# Altium PCB PCB_CDCEMU2000HW01.PcbDoc
Units mm, origin at the board's own origin, x right, y up, seen from the top; angles counter-clockwise.
Board outline 51 x 111 mm, 2 copper layers (Top Layer, Bottom Layer); 108 components, 88 nets, 362 pads, 22 vias.
Unrouted connection lines stored in the file: 3.
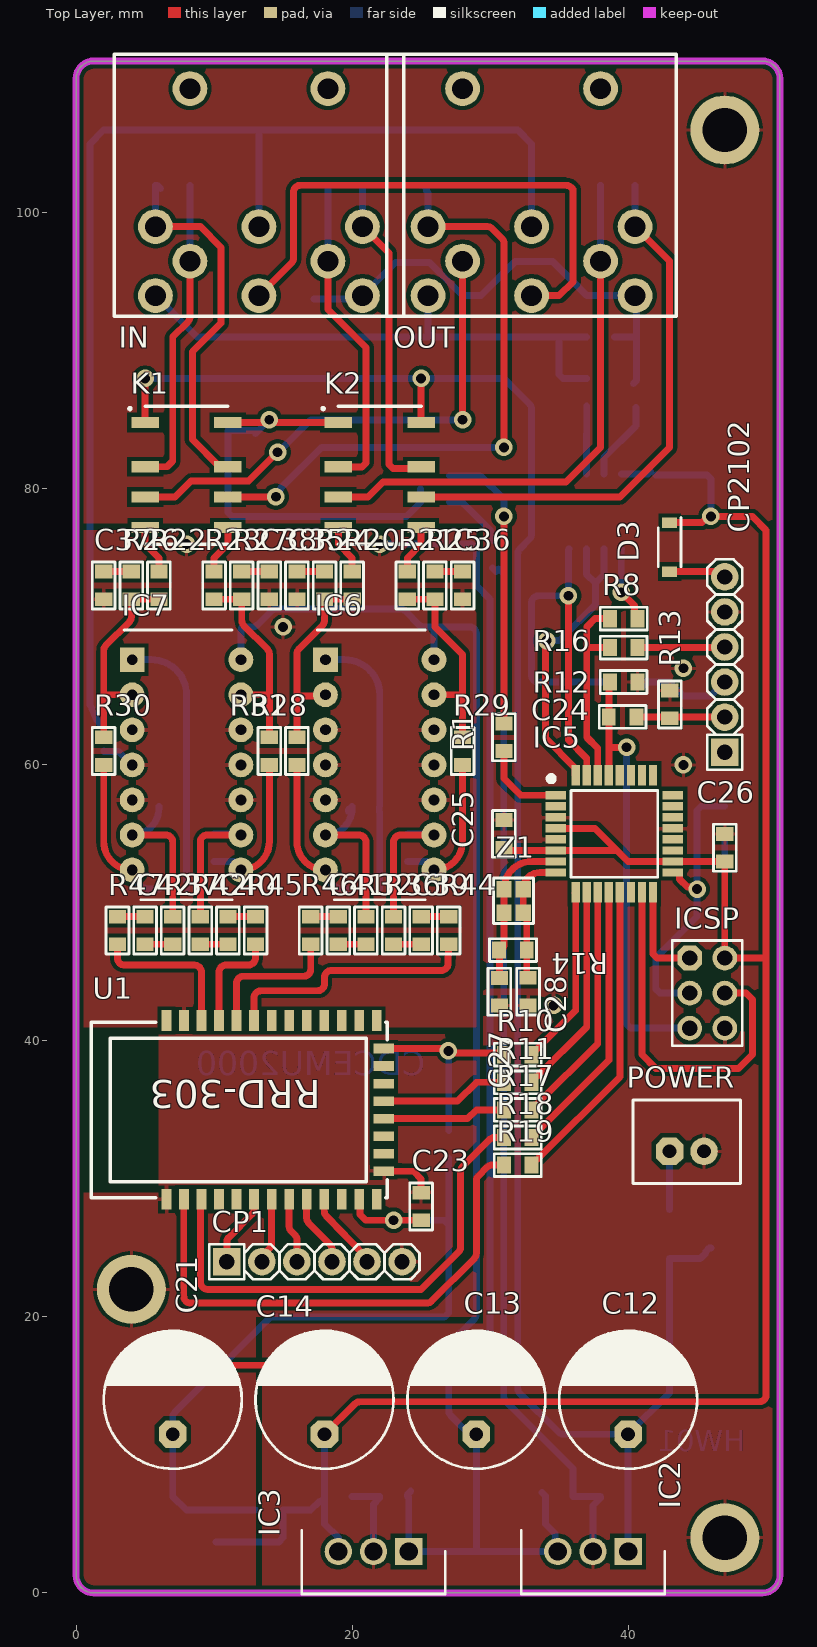
[diagram p0: Top Layer view]
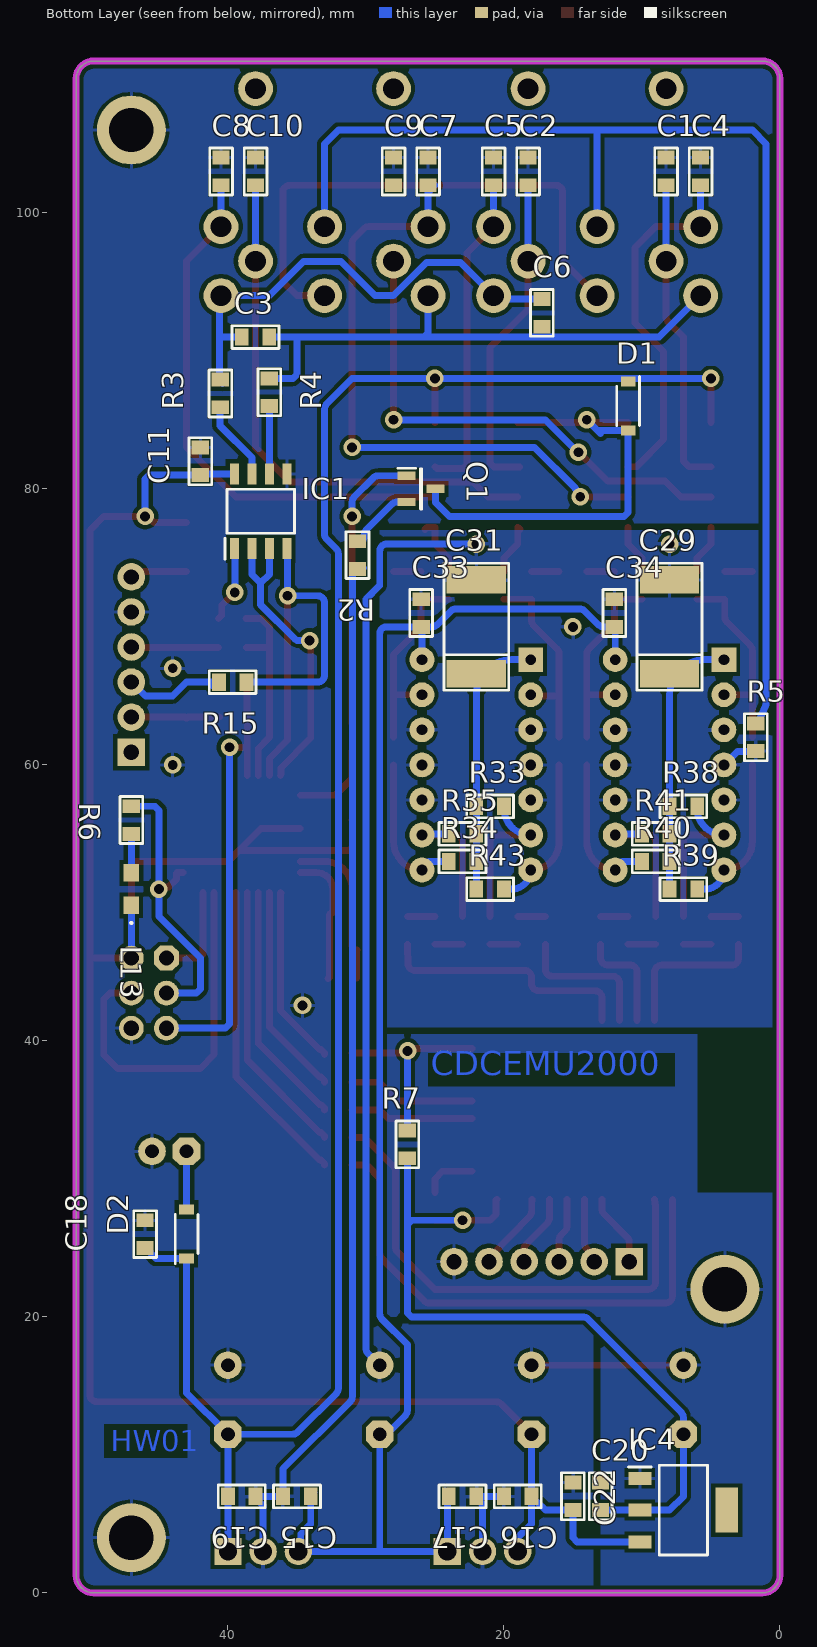
[diagram p1: Bottom Layer view, seen from below]
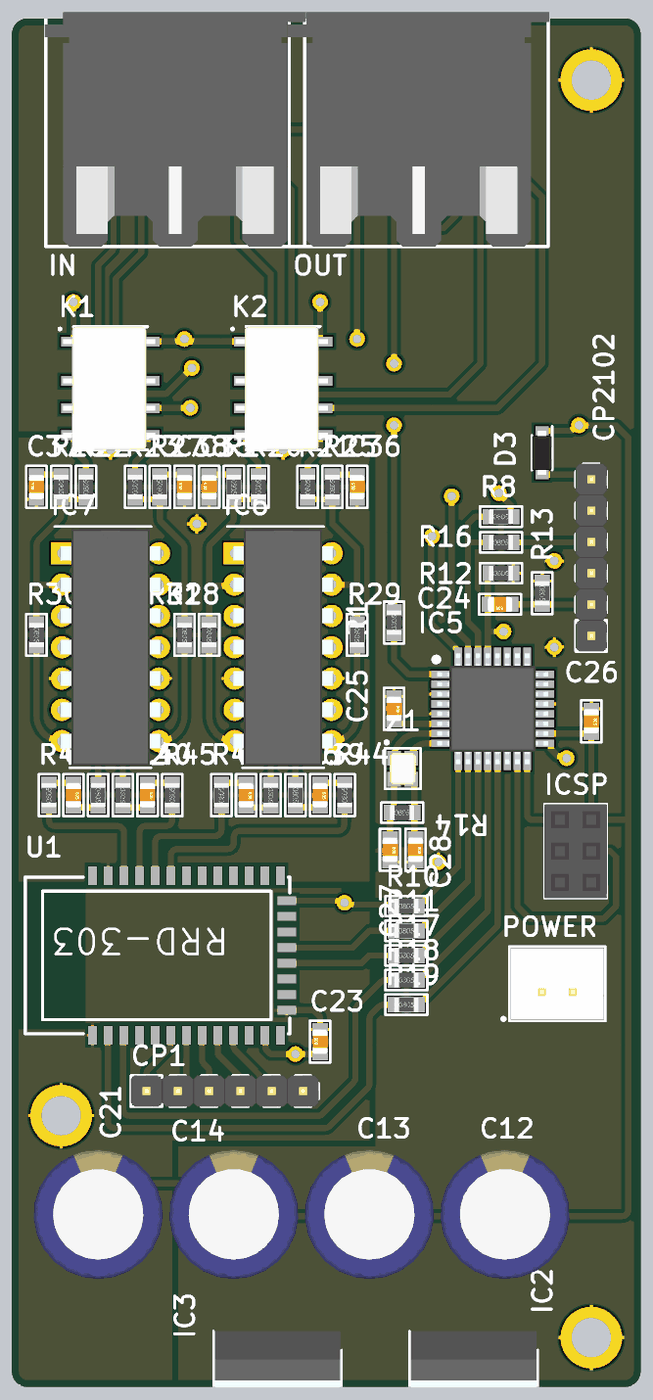
[diagram p2: 3D render of the assembled board from above, using the file's embedded part models]
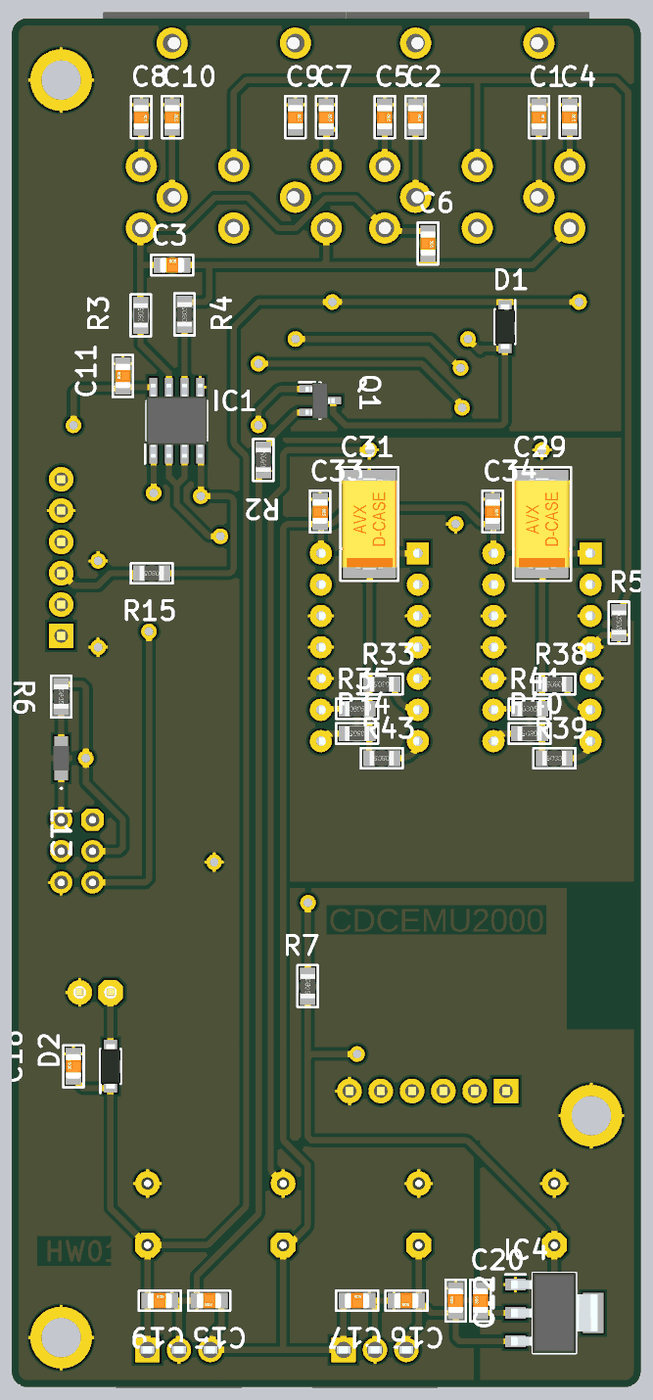
[diagram p3: 3D render of the assembled board from below, using the file's embedded part models]

## Layer stack, top to bottom
Top Solder: solder mask 0.0102, Solder Resist, Dk 3.5
Top Layer: signal copper 0.0356
Dielectric 1: dielectric 0.32, FR-4, Dk 4.8
Bottom Layer: signal copper 0.0356
Bottom Solder: solder mask 0.0102, Solder Resist, Dk 3.5

## Board outline
0,1.27 0,109.73 cw(c1.27,109.73) 1.27,111 49.73,111 cw(c49.73,109.73) 51,109.73 51,1.27 cw(c49.73,1.27) 49.73,0 1.27,0 cw(c1.27,1.27)

## Design rules (kind name [scope] priority, off if disabled: settings)
Clearance [All] p1: gap=0.2 ignorepadtopadclearanceinfootprint=FALSE except(0.3: Arc-Fill Arc-Poly Arc-Region Track-Fill Track-Poly Track-Region SMDPad-Fill SMDPad-Poly SMDPad-Region THPad-Fill THPad-Poly THPad-Region Via-Fill Via-Poly Via-Region Fill-Fill Fill-Poly Fill-Region Poly-Poly Poly-Region Region-Region)
ComponentClearance [All] p1: gap=0 collisioncheckmode=3 verticalgap=0 showdistances=FALSE
PolygonConnect [All] p1: connectstyle=Relief reliefconductorwidth=0.254 reliefentries=4 polygonreliefangle="90 Angle" airgapwidth=0.254
RoutingVias [All] p1: holewidth=0.711 width=1.27 viastyle="Through Hole" minholewidth=0.711 minwidth=1.27 maxholewidth=0.711 maxwidth=1.27
SolderMaskExpansion [All] p1: expansion=0.15 istentingtop=FALSE
Width [All] p1: maxlimit=1 minlimit=0.5 preferedwidth=0.75 minimp=50.000000 maximp=50.000000 favimp=50.000000
29 further rules are at their usual default settings.

## Classes and differential pairs
component class DIFFAMP: C29 C31 C33 C34 C35 C36 C37 C38 C39 C40 C41 C42 IC6 IC7 R5 R20 R21 R22 R23 R24 R25 R26 R27 R28 R29 R30 R31 R32 R33 R34 R35 R36 R37 R38 R39 R40 R41 R42 R43 R44 R45 R46 R47
component class "Relay and connector": C1 C2 C3 C4 C5 C6 C7 C8 C9 C10 C11 C12 C13 C14 C15 C16 C17 C18 C19 D1 D2 IC1 IC2 IC3 IN K1 K2 OUT POWER Q1 R1 R2 R3 R4 R8
component class MC: C20 C21 C22 C23 C24 C25 C26 C27 C28 CP1 CP2102 D3 IC4 IC5 ICSP L13 R6 R7 R10 R11 R12 R13 R14 R15 R16 R17 R18 R19 U1 Z1

## Components (designator, comment, footprint, x,y, rotation, side; value= is the part's Value field where it differs from the comment)
C1 "Ceramic capacitor, 10pF, X7R, ±10%, 16V, 0805, -55...+125°C" "CAP: 0805" 8.25,103 r270 bottom value=10pF
C2 "Ceramic capacitor, 10pF, X7R, ±10%, 16V, 0805, -55...+125°C" "CAP: 0805" 18.25,103 r270 bottom value=10pF
C3 "Ceramic capacitor, 1nF, X7R, ±10%, 16V, 0805, -55...+125°C" "CAP: 0805" 38,91 r180 bottom value=1nF
C4 "Ceramic capacitor, 10pF, X7R, ±10%, 16V, 0805, -55...+125°C" "CAP: 0805" 5.75,103 r270 bottom value=10pF
C5 "Ceramic capacitor, 10pF, X7R, ±10%, 16V, 0805, -55...+125°C" "CAP: 0805" 20.75,103 r270 bottom value=10pF
C6 "Ceramic capacitor, 1nF, X7R, ±10%, 16V, 0805, -55...+125°C" "CAP: 0805" 17.25,92.75 r270 bottom value=1nF
C7 "Ceramic capacitor, 10pF, X7R, ±10%, 16V, 0805, -55...+125°C" "CAP: 0805" 25.5,103 r270 bottom value=10pF
C8 "Ceramic capacitor, 10pF, X7R, ±10%, 16V, 0805, -55...+125°C" "CAP: 0805" 40.5,103 r270 bottom value=10pF
C9 "Ceramic capacitor, 10pF, X7R, ±10%, 16V, 0805, -55...+125°C" "CAP: 0805" 28,103 r270 bottom value=10pF
C10 "Ceramic capacitor, 10pF, X7R, ±10%, 16V, 0805, -55...+125°C" "CAP: 0805" 38,103 r270 bottom value=10pF
C11 "Ceramic capacitor, 0.1μF, X7R, ±10%, , 0805, -55...+125°C" "CAP: 0805" 42,82 r90 bottom value=0.1μF
C12 "Aluminium capacitor, 220μF, 25V, ±20%, 54mOhm, 14x10x5 mm, -55...+105°C" "CAP: D10C5H20" 40,14 r90 top value=220μF
C13 "Aluminium capacitor, 220μF, 25V, ±20%, 54mOhm, 14x10x5 mm, -55...+105°C" "CAP: D10C5H20" 29,14 r90 top value=220μF
C14 "Aluminium capacitor, 220μF, 25V, ±20%, 54mOhm, 14x10x5 mm, -55...+105°C" "CAP: D10C5H20" 18,14 r90 top value=220μF
C15 "Ceramic capacitor, 0.1μF, X7R, ±10%, , 0805, -55...+125°C" "CAP: 0805" 35,7 r0 bottom value=0.1μF
C16 "Ceramic capacitor, 0.1μF, X7R, ±10%, , 0805, -55...+125°C" "CAP: 0805" 19,7 r0 bottom value=0.1μF
C17 "Ceramic capacitor, 0.1μF, X7R, ±10%, , 0805, -55...+125°C" "CAP: 0805" 23,7 r180 bottom value=0.1μF
C18 "Ceramic capacitor, 0.1μF, X7R, ±10%, , 0805, -55...+125°C" "CAP: 0805" 46,26 r90 bottom value=0.1μF
C19 "Ceramic capacitor, 0.1μF, X7R, ±10%, , 0805, -55...+125°C" "CAP: 0805" 39,7 r180 bottom value=0.1μF
C20 "Ceramic capacitor, 0.1μF, X7R, ±10%, , 0805, -55...+125°C" "CAP: 0805" 13,7 r90 bottom value=0.1μF
C21 "Aluminium capacitor, 220μF, 25V, ±20%, 54mOhm, 14x10x5 mm, -55...+105°C" "CAP: D10C5H20" 7,14 r90 top value=220μF
C22 "Ceramic capacitor, 0.1μF, X7R, ±10%, , 0805, -55...+125°C" "CAP: 0805" 15,7 r90 bottom value=0.1μF
C23 "Ceramic capacitor, 0.1μF, X7R, ±10%, , 0805, -55...+125°C" "CAP: 0805" 25,28 r90 top value=0.1μF
C24 "Ceramic capacitor, 0.1μF, X7R, ±10%, , 0805, -55...+125°C" "CAP: 0805" 39.6,63.475 r180 top value=0.1μF
C25 "Ceramic capacitor, 0.1μF, X7R, ±10%, , 0805, -55...+125°C" "CAP: 0805" 31,55 r270 top value=0.1μF
C26 "Ceramic capacitor, 0.1μF, X7R, ±10%, , 0805, -55...+125°C" "CAP: 0805" 47,54 r270 top value=0.1μF
C27 "Ceramic capacitor, 9pF, X7R, ±10%, , 0805, -55...+125°C" "CAP: 0805" 30.672,43.564 r270 top value=9pF
C28 "Ceramic capacitor, 9pF, X7R, ±10%, , 0805, -55...+125°C" "CAP: 0805" 32.745,43.568 r270 top value=9pF
C29 "Tantalum capacitor, 100μF, 16V, ±20%, 900mOhm, case D (7343), -55...+125°C" "CAP: TANTAL-D" 8,70 r90 bottom value=100μF
C31 "Tantalum capacitor, 100μF, 16V, ±20%, 900mOhm, case D (7343), -55...+125°C" "CAP: TANTAL-D" 22,70 r90 bottom value=100μF
C33 "Ceramic capacitor, 0.1μF, X7R, ±10%, 16V, 0805, -55...+125°C" "CAP: 0805" 26,71 r270 bottom value=0.1μF
C34 "Ceramic capacitor, 0.1μF, X7R, ±10%, 16V, 0805, -55...+125°C" "CAP: 0805" 12,71 r270 bottom value=0.1μF
C35 "Ceramic capacitor, 0.1μF, X7R, ±10%, 16V, 0805, -55...+125°C" "CAP: 0805" 16,73 r90 top value=0.1μF
C36 "Ceramic capacitor, 0.1μF, X7R, ±10%, 16V, 0805, -55...+125°C" "CAP: 0805" 28,73 r90 top value=0.1μF
C37 "Ceramic capacitor, 0.1μF, X7R, ±10%, 16V, 0805, -55...+125°C" "CAP: 0805" 2,73 r90 top value=0.1μF
C38 "Ceramic capacitor, 0.1μF, X7R, ±10%, 16V, 0805, -55...+125°C" "CAP: 0805" 14,73 r90 top value=0.1μF
C39 "Ceramic capacitor, 1μF, X7R, ±10%, 16V, 0805, -55...+125°C" "CAP: 0805" 25,48 r270 top value=1μF
C40 "Ceramic capacitor, 1μF, X7R, ±10%, 16V, 0805, -55...+125°C" "CAP: 0805" 11,48 r270 top value=1μF
C41 "Ceramic capacitor, 1μF, X7R, ±10%, 16V, 0805, -55...+125°C" "CAP: 0805" 19,48 r270 top value=1μF
C42 "Ceramic capacitor, 1μF, X7R, ±10%, 16V, 0805, -55...+125°C" "CAP: 0805" 5,48 r270 top value=1μF
CP1 "Connector, 6pin, 2.54mm, 500VAC, 3A" "CON: PLS-6" 17.27,24 r0 top
CP2102 "Connector, 6pin, 2.54mm, 500VAC, 3A" "CON: PLS-6" 47,67.27 r90 top
D1 "SM4001PLHE3-TP" SODFL3616X135N 11,86 r270 bottom
D2 "SM4001PLHE3-TP" SODFL3616X135N 43,26 r90 bottom
D3 "SM4001PLHE3-TP" SODFL3616X135N 43,75.775 r270 top
IC1 "MAX485ECSA+" SOIC127P600X175-8N 37.623,78.375 r90 bottom
IC2 "L7809CV" TO255P460X1020X2008-3P 40,3 r180 top
IC3 "L7805CV" TO255P460X1020X2008-3P 24.1,3 r180 top
IC4 "LD1117AS33TR" SOT230P700X190-4N 7,6 r180 bottom
IC5 "ATMEGA328-AU" QFP80P900X900X120-32N 39,55 r0 top
IC6 "LM1877N-9_NOPB" DIP787W58P254L1918H508Q14N 22,60 r0 top
IC7 "LM1877N-9_NOPB" DIP787W58P254L1918H508Q14N 8,60 r0 top
ICSP "Connector, 6pin, 2.54mm, 500VAC, 3A" "CON: PBD-6" 45.73,43.46 r270 top
IN "DS-8-102" DS-8-102 2.75,92.5 r0 top
K1 "IM03GR" IM06GR 8,81 r270 top
K2 "IM03GR" IM06GR 22,81 r270 top
L13 "KP2012SGC" KP2012SGC 47,51 r90 bottom
OUT "DS-8-102" DS-8-102 22.5,92.5 r0 top
POWER "Connector, 2pin, 2.54mm, 250VAC, 3A" "CON: CWF-2" 44.25,32 r0 top
Q1 "IRLML6244TRPBF" SOT95P237X112-3N 26,80 r180 bottom
R1 "Resistor film, 10, ±5%, 0805, 0.125W, -55...+125°C" "RES: 0805" 31,62 r90 top value=10
R2 "Resistor film, 10, ±5%, 0805, 0.125W, -55...+125°C" "RES: 0805" 30.612,75.198 r90 bottom value=10
R3 "Resistor film, 10, ±5%, 0805, 0.125W, -55...+125°C" "RES: 0805" 40.55,86.914 r90 bottom value=10
R4 "Resistor film, 10, ±5%, 0805, 0.125W, -55...+125°C" "RES: 0805" 37,87 r90 bottom value=10
R5 "Resistor film, 0, ±5%, 0805, 0.125W, -55...+125°C" "RES: 0805" 1.75,62 r270 bottom value=0
R6 "Resistor film, 1k, ±5%, 0805, 0.125W, -55...+125°C" "RES: 0805" 47,56 r270 bottom value=1k
R7 "Resistor film, 10k, ±5%, 0805, 0.125W, -55...+125°C" "RES: 0805" 27,32.5 r270 bottom value=10k
R8 "Resistor film, 1k, ±5%, 0805, 0.125W, -55...+125°C" "RES: 0805" 39.676,70.592 r0 top value=1k
R10 "Resistor film, 10k, ±5%, 0805, 0.125W, -55...+125°C" "RES: 0805" 32,39 r0 top value=10k
R11 "Resistor film, 10k, ±5%, 0805, 0.125W, -55...+125°C" "RES: 0805" 32,37 r0 top value=10k
R12 "Resistor film, 10k, ±5%, 0805, 0.125W, -55...+125°C" "RES: 0805" 39.675,66.005 r0 top value=10k
R13 "Resistor film, 10k, ±5%, 0805, 0.125W, -55...+125°C" "RES: 0805" 43.015,64.378 r270 top value=10k
R14 "Resistor film, 1M, ±5%, 0805, 0.125W, -55...+125°C" "RES: 0805" 31.651,46.58 r0 top value=1M
R15 "Resistor film, 1k, ±5%, 0805, 0.125W, -55...+125°C" "RES: 0805" 39.657,65.995 r0 bottom value=1k
R16 "Resistor film, 1k, ±5%, 0805, 0.125W, -55...+125°C" "RES: 0805" 39.675,68.499 r0 top value=1k
R17 "Resistor film, 10k, ±5%, 0805, 0.125W, -55...+125°C" "RES: 0805" 32,35 r0 top value=10k
R18 "Resistor film, 10k, ±5%, 0805, 0.125W, -55...+125°C" "RES: 0805" 32,33 r0 top value=10k
R19 "Resistor film, 10k, ±5%, 0805, 0.125W, -55...+125°C" "RES: 0805" 32,31 r0 top value=10k
R20 "Resistor film, 0, ±5%, 0805, 0.125W, -55...+125°C" "RES: 0805" 20,73 r90 top value=0
R21 "Resistor film, 0, ±5%, 0805, 0.125W, -55...+125°C" "RES: 0805" 24,73 r90 top value=0
R22 "Resistor film, 0, ±5%, 0805, 0.125W, -55...+125°C" "RES: 0805" 6,73 r90 top value=0
R23 "Resistor film, 0, ±5%, 0805, 0.125W, -55...+125°C" "RES: 0805" 10,73 r90 top value=0
R24 "Resistor film, 100, ±5%, 0805, 0.125W, -55...+125°C" "RES: 0805" 18,73 r270 top value=100
R25 "Resistor film, 100, ±5%, 0805, 0.125W, -55...+125°C" "RES: 0805" 26,73 r90 top value=100
R26 "Resistor film, 100, ±5%, 0805, 0.125W, -55...+125°C" "RES: 0805" 4,73 r270 top value=100
R27 "Resistor film, 100, ±5%, 0805, 0.125W, -55...+125°C" "RES: 0805" 12,73 r90 top value=100
R28 "Resistor film, 10k, ±5%, 0805, 0.125W, -55...+125°C" "RES: 0805" 16,61 r270 top value=10k
R29 "Resistor film, 10k, ±5%, 0805, 0.125W, -55...+125°C" "RES: 0805" 28,61 r270 top value=10k
R30 "Resistor film, 10k, ±5%, 0805, 0.125W, -55...+125°C" "RES: 0805" 2,61 r270 top value=10k
R31 "Resistor film, 10k, ±5%, 0805, 0.125W, -55...+125°C" "RES: 0805" 14,61 r270 top value=10k
R32 "Resistor film, 1k, ±5%, 0805, 0.125W, -55...+125°C" "RES: 0805" 21,48 r270 top value=1k
R33 "Resistor film, 100k, ±5%, 0805, 0.125W, -55...+125°C" "RES: 0805" 21,57 r0 bottom value=100k
R34 "Resistor film, 1k, ±5%, 0805, 0.125W, -55...+125°C" "RES: 0805" 23,53 r0 bottom value=1k
R35 "Resistor film, 100k, ±5%, 0805, 0.125W, -55...+125°C" "RES: 0805" 23,55 r180 bottom value=100k
R36 "Resistor film, 1k, ±5%, 0805, 0.125W, -55...+125°C" "RES: 0805" 23,48 r270 top value=1k
R37 "Resistor film, 1k, ±5%, 0805, 0.125W, -55...+125°C" "RES: 0805" 7,48 r270 top value=1k
R38 "Resistor film, 100k, ±5%, 0805, 0.125W, -55...+125°C" "RES: 0805" 7,57 r0 bottom value=100k
R39 "Resistor film, 1k, ±5%, 0805, 0.125W, -55...+125°C" "RES: 0805" 7,51 r0 bottom value=1k
R40 "Resistor film, 1k, ±5%, 0805, 0.125W, -55...+125°C" "RES: 0805" 9,53 r0 bottom value=1k
R41 "Resistor film, 100k, ±5%, 0805, 0.125W, -55...+125°C" "RES: 0805" 9,55 r180 bottom value=100k
R42 "Resistor film, 1k, ±5%, 0805, 0.125W, -55...+125°C" "RES: 0805" 9,48 r270 top value=1k
R43 "Resistor film, 1k, ±5%, 0805, 0.125W, -55...+125°C" "RES: 0805" 21,51 r0 bottom value=1k
R44 "Resistor film, 10k, ±5%, 0805, 0.125W, -55...+125°C" "RES: 0805" 27,48 r90 top value=10k
R45 "Resistor film, 10k, ±5%, 0805, 0.125W, -55...+125°C" "RES: 0805" 13,48 r90 top value=10k
R46 "Resistor film, 10k, ±5%, 0805, 0.125W, -55...+125°C" "RES: 0805" 17,48 r90 top value=10k
R47 "Resistor film, 10k, ±5%, 0805, 0.125W, -55...+125°C" "RES: 0805" 3,48 r90 top value=10k
U1 "RRD-303" RRD-303 12,35 r90 top
Z1 "Crystal, 16MHz, 16pF, ±20ppm, case 2520, -40...+85°C" "OSC: 2520" 31,51 r270 top

## Footprints (in the part's own frame and the unit in brackets; to place one, negate y for a bottom-side part, rotate by r counter-clockwise, add the part's x,y. Pads: shape width x height; smd on the part's side, far side on the other; paste and mask are expansions set on the pad)
"CAP: 0805" [mm]
  rect 1x1.25 smd: 1(-1,0) 2(1,0)
  silkscreen extent -1.7,-0.82 1.7,0.82, body extent -1,-0.62 1,0.63, height 0.78
"CAP: D10C5H20" [mm]
  oct 2x2 hole 1: 1(-2.5,0)
  round 2 hole 1: 2(2.5,0)
  silkscreen extent -5,-5 5,5, body extent -5.25,-5.25 5.25,5.25, height 22
"CAP: TANTAL-D" [mm]
  rect 2x4.3 smd: 1(-3.4,0) 2(3.4,0)
  silkscreen extent -4.6,-2.35 4.6,2.35, body extent -3.7,-2.22 3.7,2.23, height 3.01
"CON: CWF-2" [mm]
  oct 2x2 hole 1: 1(-1.25,0)
  round 2 hole 1: 2(1.25,0)
  round 0.5 on Top Overlay: ""(-4.375,-2.15)
  round 0.5 on Mech1: ""(-3.2,-1.7)
  silkscreen extent -3.9,-2.32 3.9,3.72, body extent -3.75,-2.18 3.75,3.57, height 7
"CON: PBD-6" [mm] "PBD-6"
  oct 1.8x1.8 hole 1.1: 1(-2.54,-1.27)
  round 1.8 hole 1.1: 2(-2.54,1.27) 3(0,-1.27) 4(0,1.27) 5(2.54,-1.27) 6(2.54,1.27)
  silkscreen extent -3.81,-2.54 3.81,2.54, body extent -3.81,-2.54 3.81,2.54, height 8.5
"CON: PLS-6" [mm]
  rect 2x2 hole 1.1: 1(-6.35,0)
  round 2 hole 1.1: 2(-3.81,0) 3(-1.27,0) 4(1.27,0) 5(3.81,0) 6(6.35,0)
  silkscreen extent -7.62,-1.27 7.62,1.27, body extent -7.62,-1.27 7.62,1.27, height 8.54
DIP787W58P254L1918H508Q14N [mm]
  rect 1.8x1.8 hole 0.784: 1(-3.937,7.62)
  round 1.8 hole 0.784: 2(-3.937,5.08) 3(-3.937,2.54) 4(-3.937,0) 5(-3.937,-2.54) 6(-3.937,-5.08) 7(-3.937,-7.62) 8(3.937,-7.62) 9(3.937,-5.08) 10(3.937,-2.54) 11(3.937,0) 12(3.937,2.54) 13(3.937,5.08) 14(3.937,7.62)
  silkscreen extent -4.53,-9.78 3.3,9.78, body extent -4.08,-9.59 4.08,9.59, height 5.08
DS-8-102 [mm]
  round 2.524 hole 1.5: 1(3,6.5) 2(10.5,6.5) 3(18,6.5) 4(5.5,4) 5(15.5,4) 6(3,1.5) 7(18,1.5) 8(10.5,1.5) ""(5.5,16.5) ""(15.5,16.5)
  silkscreen extent 0,0 21,19, body extent -0.1,0 21.1,19, height 19.5
IM06GR [mm]
  rect 0.8x2 smd: 1(-3.8,-3) 2(-0.6,-3) 3(1.6,-3) 4(3.8,-3) 5(3.8,3) 6(1.6,3) 7(-0.6,3) 8(-3.8,3)
  silkscreen extent -5,-4.17 5,3, body extent -5,-3.86 5,3.64, height 5.65
KP2012SGC [mm]
  rect 1.25x1.1 smd: 1(-1.175,0) 2(1.175,0)
  silkscreen extent -2.5,-0.05 -2.4,0.05, body extent -1,-0.63 1,0.63, height 1.2
"OSC: 2520" [mm]
  rect 1.2x1.1 smd: 1(0,0) 2(1.7,0) 3(1.7,1.4) 4(0,1.4)
  round 0.5 on Mech1: 5(-0.075,0.025)
  round 0.5 on Top Overlay: ""(-1.275,-0.6)
  silkscreen extent -0.8,-0.75 2.5,2.15, body extent -0.45,-0.35 2.15,1.75, height 0.55
QFP80P900X900X120-32N [mm]
  rect 1.475x0.6 smd: 1(-4.238,2.8) 2(-4.238,2) 3(-4.238,1.2) 4(-4.238,0.4) 5(-4.238,-0.4) 6(-4.238,-1.2) 7(-4.238,-2) 8(-4.238,-2.8) 17(4.238,-2.8) 18(4.238,-2) 19(4.238,-1.2) 20(4.238,-0.4) 21(4.238,0.4) 22(4.238,1.2) 23(4.238,2) 24(4.238,2.8)
  rect 0.6x1.475 smd: 9(-2.8,-4.238) 10(-2,-4.238) 11(-1.2,-4.238) 12(-0.4,-4.238) 13(0.4,-4.238) 14(1.2,-4.238) 15(2,-4.238) 16(2.8,-4.238) 25(2.8,4.238) 26(2,4.238) 27(1.2,4.238) 28(0.4,4.238) 29(-0.4,4.238) 30(-1.2,4.238) 31(-2,4.238) 32(-2.8,4.238)
  silkscreen extent -4.77,-3.15 3.15,4.2, body extent -4.5,-4.5 4.5,4.5, height 1.2
"RES: 0805" [mm]
  rect 1x1.25 smd: 1(-1,0) 2(1,0)
  silkscreen extent -1.7,-0.82 1.7,0.82, body extent -1,-0.6 1,0.6, height 0.44
RRD-303 [mm]
  rect 1.5x0.7 smd paste+0 mask+0.051: 1(-6.477,5.455) 2(-6.477,4.185) 3(-6.477,2.915) 4(-6.477,1.645) 5(-6.477,0.375) 6(-6.477,-0.895) 7(-6.477,-2.165) 8(-6.477,-3.435) 9(-6.477,-4.705) 10(-6.477,-5.975) 11(-6.477,-7.245) 12(-6.477,-8.515) 13(-6.477,-9.785) 14(6.477,5.455) 15(6.477,4.185) 16(6.477,2.915) 17(6.477,1.645) 18(6.477,0.375) 19(6.477,-0.895) 20(6.477,-2.165) 21(6.477,-3.435) 22(6.477,-4.705) 23(6.477,-5.975) 24(6.477,-7.245) 25(6.477,-8.515) 26(6.477,-9.785)
  rect 0.7x1.5 smd paste+0 mask+0.051: 27(-4.445,-10.293) 28(-3.175,-10.293) 29(-1.905,-10.293) 30(-0.635,-10.293) 31(0.635,-10.293) 32(1.905,-10.293) 33(3.175,-10.293) 34(4.445,-10.293)
  silkscreen extent -6.35,-10.55 6.35,10.92
SODFL3616X135N [mm]
  rect 0.74x1.07 smd: 1(-1.775,0) 2(1.775,0)
  silkscreen extent -2.14,-0.82 1.41,0.82, body extent -1.8,-0.8 1.8,0.8, height 1.2
SOIC127P600X175-8N [mm]
  rect 1.525x0.65 smd: 1(-2.712,1.905) 2(-2.712,0.635) 3(-2.712,-0.635) 4(-2.712,-1.905) 5(2.712,-1.905) 6(2.712,-0.635) 7(2.712,0.635) 8(2.712,1.905)
  silkscreen extent -3.47,-2.45 1.6,2.58, body extent -3,-2.45 3,2.45, height 1.75
SOT95P237X112-3N [mm]
  rect 1.3x0.6 smd: 1(-1.05,0.95) 2(-1.05,-0.95) 3(1.05,0)
  silkscreen extent -1.7,-1.46 0.05,1.5, body extent -1.18,-1.46 1.18,1.46, height 1.12
SOT230P700X190-4N [mm]
  rect 1.65x0.95 smd: 1(-3.15,2.3) 2(-3.15,0) 3(-3.15,-2.3)
  rect 1.65x3.25 smd: 4(3.15,0)
  silkscreen extent -3.98,-3.25 1.75,3.25, body extent -3.5,-3.25 3.5,3.25, height 1.9
TO255P460X1020X2008-3P [mm]
  rect 1.98x1.98 hole 1.32: 1(0,0)
  round 1.98 hole 1.32: 2(2.55,0) 3(5.1,0)
  silkscreen extent -2.65,-1.53 7.75,3.07, body extent -2.55,-1.53 7.65,3.07, height 19.21

## Part data
C1 C2 C3 C4 C5 C6 C7 C8 C9 C10 C33 C34 C35 C36 C37 C38 C39 C40 C41 C42: library part Ceramic_0805, Manufacturer=Yageo, Package=0805, PartNumber=CC0805KRX7R7BB104, Temperature=-55...+125°C, Tolerance=±10%, TypeCapacitor="Ceramic capacitor", TypeDielectric=X7R, Voltage=16V, HelpURL=https://www.digikey.com/product-detail/en/yageo/CC0805KRX7R7BB104/311-1142-1-ND/303052
  C1 C2 C4 C5 C7 C8 C9 C10: ValueManufacturerPartNumber="Ceramic capacitor, 10pF, X7R, ±10%, 16V, 0805, -55...+125°C"
  C3 C6: ValueManufacturerPartNumber="Ceramic capacitor, 1nF, X7R, ±10%, 16V, 0805, -55...+125°C"
  C33 C34 C35 C36 C37 C38: ValueManufacturerPartNumber="Ceramic capacitor, 0.1μF, X7R, ±10%, 16V, 0805, -55...+125°C"
  C39 C40 C41 C42: ValueManufacturerPartNumber="Ceramic capacitor, 1μF, X7R, ±10%, 16V, 0805, -55...+125°C"
C11 C15 C16 C17 C18 C19 C20 C22 C23 C24 C25 C26 C27 C28: library part Ceramic_0805, Manufacturer=Yageo, Package=0805, PartNumber=CC0805KRX7R7BB104, Temperature=-55...+125°C, Tolerance=±10%, TypeCapacitor="Ceramic capacitor", TypeDielectric=X7R, HelpURL=https://www.digikey.com/product-detail/en/yageo/CC0805KRX7R7BB104/311-1142-1-ND/303052
  C11 C15 C16 C17 C18 C19 C20 C22 C23 C24 C25 C26: ValueManufacturerPartNumber="Ceramic capacitor, 0.1μF, X7R, ±10%, , 0805, -55...+125°C"
  C27 C28: ValueManufacturerPartNumber="Ceramic capacitor, 9pF, X7R, ±10%, , 0805, -55...+125°C"
C12 C13 C14 C21: library part Aluminium, Manufacturer=Wurth, Package="14x10x5 mm", PartNumber=860080475013, Temperature=-55...+105°C, Tolerance=±20%, TypeCapacitor="Aluminium capacitor", Voltage=25V, HelpURL=https://www.digikey.com/product-detail/en/wurth-electronics-inc/860080475013/732-9029-1-ND/5728972, Impedance=54mOhm, ValueManufacturerPartNumber="Aluminium capacitor, 220μF, 25V, ±20%, 54mOhm, 14x10x5 mm, -55...+105°C"
C29 C31: library part Tantal_D, Manufacturer=AVX, Package="case D (7343)", PartNumber=TAJD476M035RNJV, Temperature=-55...+125°C, Tolerance=±20%, TypeCapacitor="Tantalum capacitor", TypeDielectric=X7R, Voltage=16V, HelpURL=https://www.digikey.com/product-detail/en/avx-corporation/TAJD476M035RNJV/478-12122-1-ND/8605695, Impedance=900mOhm, ValueManufacturerPartNumber="Tantalum capacitor, 100μF, 16V, ±20%, 900mOhm, case D (7343), -55...+125°C"
CP1 CP2102: library part PLS-6, CurrentMax=3A, Manufacturer=Connfly, VoltageMax=500VAC, HelpURL=https://www.chipdip.ru/product/pls-6, Multichannel=6pin, PartNumber=PLS-6, Pitch=2.54mm, TypeConnector=Connector, ValueManufacturerPartNumber="Connector, 6pin, 2.54mm, 500VAC, 3A"
  CP1: CommentText="\"QCCSPI\""
  CP2102: CommentText="\"CP2102\""
D1 D2 D3: "Diode", Manufacturer_Name=MCC, Mouser Part Number=833-SM4001PLHE3-TP, Arrow Part Number=SM4001PLHE3-TP, Arrow Price/Stock=https://www.arrow.com/en/products/sm4001plhe3-tp/micro-commercial-components?region=nac, Datasheet Link=https://www.mccsemi.com/pdf/Products/SM4001PLHE3-SM4007PLHE3(SOD-123FL).pdf, Height=1.35mm, Manufacturer_Part_Number=SM4001PLHE3-TP, Mouser Price/Stock=https://www.mouser.co.uk/ProductDetail/Micro-Commercial-Components-MCC/SM4001PLHE3-TP?qs=QNEnbhJQKvZveZWFAoodWg%3D%3D
IC1: "Integrated Circuit", Manufacturer_Name="Analog Devices", Mouser Part Number=700-MAX485ECSA, Arrow Part Number=MAX485ECSA+, Arrow Price/Stock=https://www.arrow.com/en/products/max485ecsa/maxim-integrated?region=nac, Datasheet Link=http://datasheets.maximintegrated.com/en/ds/MAX1487E-MAX491E.pdf, Height=1.75mm, Manufacturer_Part_Number=MAX485ECSA+, Mouser Price/Stock=https://www.mouser.co.uk/ProductDetail/Analog-Devices-Maxim-Integrated/MAX485ECSA%2b?qs=1THa7WoU59Gy3FCdT5o1Tg%3D%3D
IC2: "Integrated Circuit", Manufacturer_Name=STMicroelectronics, Mouser Part Number=511-L7809CV, Arrow Part Number=L7809CV, Arrow Price/Stock=https://www.arrow.com/en/products/l7809cv/stmicroelectronics?region=europe, Datasheet Link=http://www.st.com/web/en/resource/technical/document/datasheet/CD00000444.pdf, Height=4.6mm, Manufacturer_Part_Number=L7809CV, Mouser Price/Stock=https://www.mouser.co.uk/ProductDetail/STMicroelectronics/L7809CV?qs=sps7W%2FwBcGH358Eg%2FiFhSA%3D%3D
IC3: "Integrated Circuit", Manufacturer_Name=STMicroelectronics, Mouser Part Number=511-L7805CV, Arrow Part Number=L7805CV, Arrow Price/Stock=https://www.arrow.com/en/products/l7805cv/stmicroelectronics?region=europe, Datasheet Link=http://www.st.com/web/en/resource/technical/document/datasheet/CD00000444.pdf, Height=4.6mm, Manufacturer_Part_Number=L7805CV, Mouser Price/Stock=https://www.mouser.co.uk/ProductDetail/STMicroelectronics/L7805CV?qs=9NrABl3fj%2FqplZAHiYUxWg%3D%3D
IC4: "Power Supply", Manufacturer_Name=STMicroelectronics, Mouser Part Number=511-LD1117AS33, Arrow Part Number=LD1117AS33TR, Arrow Price/Stock=https://www.arrow.com/en/products/ld1117as33tr/stmicroelectronics?region=europe, Datasheet Link=https://4donline.ihs.com/images/VipMasterIC/IC/SGST/SGSTS49356/SGSTS49356-1.pdf?hkey=6D3A4C79FDBF58556ACFDE234799DDF0, Height=1.9mm, Manufacturer_Part_Number=LD1117AS33TR, Mouser Price/Stock=https://www.mouser.co.uk/ProductDetail/STMicroelectronics/LD1117AS33TR?qs=C3bf%2FVrkE5CoDDd7wyn%252BaQ%3D%3D
IC5: "Integrated Circuit", Manufacturer_Name=Microchip, Mouser Part Number=556-ATMEGA328-AU, Arrow Part Number=ATMEGA328-AU, Arrow Price/Stock=https://www.arrow.com/en/products/atmega328-au/microchip-technology?region=europe, Datasheet Link=https://ww1.microchip.com/downloads/en/DeviceDoc/ATmega48A-PA-88A-PA-168A-PA-328-P-DS-DS40002061B.pdf, Height=1.2mm, Manufacturer_Part_Number=ATMEGA328-AU, Mouser Price/Stock=https://www.mouser.co.uk/ProductDetail/Microchip-Technology/ATMEGA328-AU?qs=lwdSMh1%2FoYJRHuGBjWz9Pg%3D%3D
IC6 IC7: "Integrated Circuit", Manufacturer_Name="Texas Instruments", Manufacturer_Part_Number=LM1877N-9/NOPB, Mouser Part Number=N/A, Datasheet Link=http://www.datasheetlib.com/datasheet/52991/lm1877n-9-nopb_national-semiconductor/download.html, Height=5.08mm, Mouser Price/Stock=https://www.mouser.com/Search/Refine.aspx?Keyword=N%2FA
ICSP: library part PBD-6, CurrentMax=3A, Manufacturer=Connfly, VoltageMax=500VAC, CommentText=ICSP, HelpURL=https://www.chipdip.ru/product/pbd-6, Multichannel=6pin, PartNumber=PBD-6, Pitch=2.54mm, TypeConnector=Connector, ValueManufacturerPartNumber="Connector, 6pin, 2.54mm, 500VAC, 3A"
K1 K2: "Relay or Contactor", Manufacturer_Name="TE Connectivity", Mouser Part Number=655-IM03GR, Arrow Part Number=IM03GR, Arrow Price/Stock=https://www.arrow.com/en/products/im03gr/te-connectivity?region=nac, Datasheet Link=https://datasheet.datasheetarchive.com/originals/distributors/Datasheets_SAMA/af0478e68580ade93768a4593bd7be66.pdf, Manufacturer_Part_Number=IM03GR, Mouser Price/Stock=https://www.mouser.co.uk/ProductDetail/TE-Connectivity/IM03GR?qs=h8jywBNgiq20bLq7q22y%252Bg%3D%3D
L13: "LED", Manufacturer_Name=Kingbright, Mouser Part Number=N/A, Datasheet Link=https://docs.rs-online.com/9e3e/0900766b8032fa8b.pdf, Height=1.1mm, Manufacturer_Part_Number=KP2012SGC, Mouser Price/Stock=https://www.mouser.co.uk/ProductDetail/Kingbright/KP2012SGC?qs=5aG0NVq1C4xgkmzx8ebWbQ%3D%3D
POWER: library part CWF-2, CurrentMax=3A, Manufacturer=Connfly, PartNumber=CWF-2R, VoltageMax=250VAC, CommentText="\"Power in\"", HelpURL=https://www.chipdip.ru/product/cwf-2r-ds1069-2-mr, Multichannel=2pin, Pitch=2.54mm, TypeConnector=Connector, ValueManufacturerPartNumber="Connector, 2pin, 2.54mm, 250VAC, 3A"
Q1: "Transistor", Manufacturer_Name=Infineon, Mouser Part Number=942-IRLML6244TRPBF, Arrow Part Number=IRLML6244TRPBF, Arrow Price/Stock=https://www.arrow.com/en/products/irlml6244trpbf/infineon-technologies-ag?region=europe, Datasheet Link=http://www.infineon.com/dgdl/irlml6244pbf.pdf?fileId=5546d462533600a4015356686fed261f, Height=1.12mm, Manufacturer_Part_Number=IRLML6244TRPBF, Mouser Price/Stock=https://www.mouser.co.uk/ProductDetail/Infineon-Technologies/IRLML6244TRPBF?qs=9%252BKlkBgLFf1HkY%2F2U%252BIhLQ%3D%3D
R1 R2 R3 R4 R5 R6 R7 R8 R10 R11 R12 R13 R14 R15 R16 R17 R18 R19 R20 R21 R22 R23 R24 R25 R26 R27 R28 R29 R30 R31 R32 R33 R34 R35 R36 R37 R38 R39 R40 R41 R42 R43 R44 R45 R46 R47: library part Resistor_0805, Manufacturer=Yageo, Package=0805, PartNumber=RC0805JR-07100RL, Power=0.125W, Temperature=-55...+125°C, Tolerance=±5%, TypeResistor="Resistor film", HelpURL=https://www.digikey.com/product-detail/en/yageo/RC0805JR-07100RL/311-100ARCT-ND/731185
  R1 R2 R3 R4: ValueManufacturerPartNumber="Resistor film, 10, ±5%, 0805, 0.125W, -55...+125°C"
  R5 R20 R21 R22 R23: ValueManufacturerPartNumber="Resistor film, 0, ±5%, 0805, 0.125W, -55...+125°C"
  R6 R8 R15 R16 R32 R34 R36 R37 R39 R40 R42 R43: ValueManufacturerPartNumber="Resistor film, 1k, ±5%, 0805, 0.125W, -55...+125°C"
  R7 R10 R11 R12 R13 R17 R18 R19 R28 R29 R30 R31 R44 R45 R46 R47: ValueManufacturerPartNumber="Resistor film, 10k, ±5%, 0805, 0.125W, -55...+125°C"
  R14: ValueManufacturerPartNumber="Resistor film, 1M, ±5%, 0805, 0.125W, -55...+125°C"
  R24 R25 R26 R27: ValueManufacturerPartNumber="Resistor film, 100, ±5%, 0805, 0.125W, -55...+125°C"
  R33 R35 R38 R41: ValueManufacturerPartNumber="Resistor film, 100k, ±5%, 0805, 0.125W, -55...+125°C"
Z1: library part Crystal_2520, Frequency=16MHz, LoadCapacitance=16pF, Manufacturer=Epson, Package="case 2520", PartNumber="FA-20H 16.0000MF20X-B", Temperature=-40...+85°C, Tolerance=±20ppm, HelpURL=https://www.digikey.com/product-detail/en/epson/FA-20H-16.0000MF20X-B/SER4202-ND/7430937, TypeOscilator=Crystal, ValueManufacturerPartNumber="Crystal, 16MHz, 16pF, ±20ppm, case 2520, -40...+85°C"

## Free pads (board coordinates)
  round 5 hole 3.2: 2(4,22) 2(47,4) 2(47,106)

## Via types
v1: diameter 1.27, hole 0.711, Top Layer to Bottom Layer, 22 vias

## Nets (pads, with @x,y where several pads share a name; then routed paths per layer and width w, separated by ;. In a path a pad name is that pad's centre, name@x,y a point inside that pad or via, vN(x,y) a via of type N, cw(c..) or ccw(c..) an arc to the next point about the centre after c; other vN are vias at no path point)
1/2VCC: C29.1 IC7.1 R38.2 R39.2 R40.1 R41.2 | length 19.5
  Bottom Layer w0.5: IC7.1 5.46,67.62 cw(c5.46,65.08) 8,65.08 R38.2 R39.2
1/2VCC2: C31.1 IC6.1 R33.2 R34.1 R35.2 R43.2 | length 19.5
  Bottom Layer w0.5: IC6.1 19.46,67.62 cw(c19.46,65.08) 22,65.08 R33.2 21.963,56.963 R33.2@21.963,56.579 ; R43.2 R34.1 R35.2 R33.2@22,56.579
+3.3: C20.1 C21.1 C23.1 IC4.2 IC4.4 R7.2 U1.12 | length 56.4
  Top Layer w0.5: U1.12 20.576,28.462 20.576,27.424 21,27 v1(23,27) C23.1
  Bottom Layer w0.5: C20.1 IC4.2 8,6 7,7 7,12.722 cw(c7.5,12.722) 7.146,13.074 13.926,19.854 cw(c14.278,19.5) 14.278,20 26.707,20 27,20.293 27,26.707 ; v1(23,27) 26.707,27 27,26.707 ; R7.2 27,26.707
+5: C11.1 C14.1 C16.1 C22.1 C25.2 C26.2 D3.1 IC1.8 IC3.3 IC4.3 IC5.4 IC5.6 IC5.18 ICSP.2 L13.1 | length 167.1
  Top Layer w0.5: C14.1 20.207,13.707 cw(c20.561,13.354) 20.561,13.854 49.5,13.854 ccw(c49.5,14.354) 50,14.354 50,46 ; C25.2 31.2,53.8 IC5.6 39.2,53.8 ; IC5.4 37.6,55.4 39.2,53.8 ; D3.1 45.342,77.55 45.792,78 v1(46,78) 49,78 50,77 50,46 ; 39.2,53.8 40,53 IC5.18 C26.2 ICSP.2 50,46
  Bottom Layer w0.5: IC4.3 14.7,3.7 15,4 C22.1 17,6 17.625,6.625 17.75,6.625 C16.1@18,6.875 ; C14.1 C16.1 C16.1@18,6.875 ; IC3.3 19,4 18,5 C16.1@18,6.875 ; IC1.8 41.454,81.087 C11.1@41.621,81.254 ; C11.1 45.707,81 46,80.707 v1(46,78) ; ICSP.2 L13.1
+9: C13.1 C15.1 C17.1 C33.2 C34.2 IC2.3 IC3.1 IC6.14 IC7.14 | length 111.5
  Bottom Layer w0.5: IC7.14 11.937,69.75 C34.2 12.793,70 ccw(c12.793,70.5) 13.146,70.146 14.15,71.15 cw(c14.503,70.796) 14.503,71.296 23.497,71.296 cw(c23.497,70.796) 23.85,71.15 24.855,70.145 ccw(c25.207,70.5) 25.206,70 25.625,70 C33.2@25.937,70 ; C17.1@24.25,7.375 24,7.125 C17.1 24.1,6.9 IC3.1 29,3 ; IC6.14 C33.2@25.937,70 ; C15.1@33.75,7.27 34,7.02 C15.1 34,5 34.72,4.28 34.72,3.18 IC2.3 29,3 ; C33.2@25.937,70 C33.2 28.5,70 cw(c28.5,69.5) 29,69.5 29,20.207 cw(c28.5,20.207) 28.854,19.854 27,18 27,13.207 ccw(c27.5,13.207) 27.146,12.854 28.25,11.75 C13.1 29,3
+14.7: C12.1 C18.1 C19.1 D1.1 D2.1 IC2.1 K1.1 K2.8 | length 141.9
  Top Layer w0.5: K1.1 v1(5,88) ; K2.8 v1(25,88)
  Bottom Layer w0.5: v1@5.22,88 v1(25,88) 31,88 32.854,86.146 cw(c32.5,85.793) 33,85.793 33,76.707 cw(c32.5,76.707) 32.854,76.354 32.146,75.646 ccw(c32.5,75.293) 32,75.293 32,14.812 ccw(c32.5,14.812) 32.146,14.458 34.959,11.646 ccw(c35.312,12) 35.312,11.5 C12.1 43,14.5 D2.1 45.225,24.225 45.625,24.625 45.625,24.75 45.875,25 C18.1 ; C19.1 C12.1 ; IC2.1 C19.1
A: IN.2 OUT.2 R5.1 | length 88
  Bottom Layer w0.5: R5.1 1.5,63.25 1.042,64.291 cw(c1.5,64.492) 1,64.492 1,105 2,106 13.25,106 ; IN.2 13.25,106 ; OUT.2 33,105 32,106 13.25,106
"BUS +": C3.2 C6.2 IN.6 OUT.6 R4.2 | length 40.4
  Bottom Layer w0.5: IN.6 8.75,91 22,91 25.793,91 ; OUT.6 25.5,91.293 25.793,91 ; R4.2 35.293,88 35,88.293 35,91 ; C3.2 35,91 ; 25.793,91 35,91
"BUS -": C3.1 C6.1 IN.7 OUT.7 R3.2 | length 35.4
  Bottom Layer w0.5: C6.1 20.5,93.75 IN.7 23.139,96.389 25.611,96.389 28,94 29.355,94 31.819,96.464 34.536,96.464 37,94 OUT.7 40.596,93.904 40.596,87.851 R3.2@40.38,87.636 ; C3.1 40.491,91
D: IN.8 OUT.8 | length 39.3
  Top Layer w0.5: IN.8 15.604,96.354 ccw(c15.25,96.707) 15.75,96.707 15.75,101.5 cw(c16.25,101.5) 16.25,102 35.5,102 cw(c35.5,101.5) 35.854,101.854 36,101.707 36,95 35,94 OUT.8
EN: CP1.5 U1.10 | length 5.7
  Top Layer w0.5: U1.10 17.983,28.023 17.983,27.659 ccw(c18.483,27.659) 18.125,27.311 20.939,24.415 cw(c20.58,24.067) 21.08,24.067 CP1.5
GND: C1.1 C2.1 C4.1 C5.1 C7.1 C8.1 C9.1 C10.1 C11.2 C12.2 C13.2 C14.2 C15.2 C16.2 C17.2 C18.2 C19.2 C20.2 C21.2 C22.2 C23.2 C25.1 C26.1 C27.2 C28.2 C29.2 C31.2 C33.1 C34.1 C35.1 C36.1 C37.1 C38.1 CP1.6 CP2102.5 IC1.5 IC2.2 IC3.2 IC4.1 IC5.3 IC5.5 IC5.21 IC6.3 IC6.4 IC6.5 IC6.10 IC6.11 IC6.12 IC7.3 IC7.4 IC7.5 IC7.10 IC7.11 IC7.12 ICSP.6 pad.2 POWER.2 R2.1 R5.2 R12.2 R13.1 U1.1 U1.15 U1.27 | length 167.1
  Top Layer w0.5: C21.2 C14.2 ; U1.27 24.445,30.555 25,30 C23.2 ; C26.1@46.873,54.873 C26.1 C26.1@46.875,55
  Bottom Layer w0.5: R5.2@2,61 2.019,60.981 3.082,60.981 IC7.4 ; C16.2 C17.2 22,6.875 21.55,6.425 IC3.2 ; v1(22,76) 28.5,76 cw(c28.5,75.5) 29,75.5 29,73 30,72 30,17.707 cw(c29.5,17.707) 29.854,17.354 C13.2 ; IC6.11 IC6.11@26,60 ; R2.1@30.182,74.273 R2.1@30.432,74.023 ; R2.1 30.987,73.948 30.987,14.22 ccw(c31.487,14.22) 31.132,13.868 31.133,13.867 36,9 C15.2 C19.2 38,6.875 37.75,6.625 37.743,6.625 37.45,6.332 IC2.2
  other v1: 34.595,42.568 44,60 44,67 15,70 8,76
LED13: IC5.17 ICSP.3 R6.1 | length 21.4
  Top Layer w0.5: IC5.17 43.676,52.2 43.726,52.15 43.726,51.713 44.291,51.147 44.853,51.147 v1(45,51)
  Bottom Layer w0.5: ICSP.3 42.293,43.46 42,43.753 42,46 45,49 v1(45,51) 45,56.707 45.293,57 R6.1
"Line in left (+)": C4.2 IN.1 K1.7 | length 27
  Top Layer w0.5: IN.1 9,99 10.5,97.5 10.5,92 8.437,89.937 8.437,83.563 10.4,81.6 K1.7
  Bottom Layer w0.5: IN.1 C4.2 5.875,102 C4.2@6.125,101.75
"Line in left (-)": C1.2 IN.4 K1.2 | length 22.7
  Top Layer w0.5: K1.2 6.6,81.6 7,82 7,91 8.104,92.104 ccw(c7.75,92.457) 8.25,92.457 IN.4
  Bottom Layer w0.5: IN.4 C1.2
"Line in right (+)": C5.2 IN.3 K2.7 | length 23.5
  Top Layer w0.5: IN.3 22.676,97.074 22.676,81.76 22.969,81.467 24.867,81.467 K2.7
  Bottom Layer w0.5: IN.3 C5.2
"Line in right (-)": C2.2 IN.5 K2.2 | length 23.5
  Top Layer w0.5: IN.5 18.25,93 21,90.25 21,81.878 20.707,81.585 K2.2@18.852,81.585
  Bottom Layer w0.5: IN.5 C2.2
"Line left (+)": K1.5 R23.2 | length 3.6
  Top Layer w0.5: R23.2 10,75 11,76 K1.5
"Line left (-)": K1.4 R22.2 | length 3.6
  Top Layer w0.5: K1.4 5,76 6,75 R22.2
"Line left N": R47.1 U1.16 | length 11.2
  Top Layer w0.5: R47.1 3,45.99 ccw(c3.5,45.99) 3.5,45.49 8.585,45.49 cw(c8.585,44.99) 9.085,44.99 U1.16
"Line left P": R45.1 U1.17 | length 7.7
  Top Layer w0.5: U1.17 10.355,44.998 cw(c10.855,44.998) 10.855,45.498 12.5,45.498 ccw(c12.5,45.998) 13,45.998 R45.1
"Line out left (+)": C7.2 K1.6 OUT.1 | length 45.8
  Top Layer w0.5: K1.6 14.454,79.4 v1(14.476,79.423) ; OUT.1 29.793,99 cw(c29.793,98.5) 30.146,98.854 30.854,98.146 cw(c30.5,97.793) 31,97.793 v1(31,83)
  Bottom Layer w0.5: v1(14.476,79.423) 14.476,79.631 14.815,79.969 14.815,80.043 17.771,83 v1(31,83) ; C7.2@25,102 25.125,102 25.375,101.75 25.375,101.582 25.5,101.457 OUT.1
"Line out left (-)": C9.2 K1.3 OUT.4 | length 37.1
  Top Layer w0.5: K1.3 7.165,79.4 8.327,80.561 12.508,80.561 v1(14.6,82.654) ; v1(28,85) OUT.4
  Bottom Layer w0.5: v1(14.6,82.654) 14.654,82.654 17,85 v1(28,85) ; OUT.4 OUT.4@28,96.805
"Line out right (+)": C8.2 K2.6 OUT.3 | length 40.1
  Top Layer w0.5: K2.6 39.4,79.4 43,83 43,96.5 OUT.3
  Bottom Layer w0.5: OUT.3@40.5,99.548 OUT.3 C8.2
"Line out right (-)": C10.2 K2.3 OUT.5 | length 39.5
  Top Layer w0.5: K2.3 21.153,79.4 22.245,80.492 35.492,80.492 38,83 OUT.5
  Bottom Layer w0.5: OUT.5 C10.2
"Line right (+)": K2.5 R21.2 | length 4.4
  Top Layer w0.5: R21.2 24,75 25,76 K2.5 25.58,77.2 K2.5@25.73,77.05
"Line right (-)": K2.4 R20.2 | length 3.8
  Top Layer w0.5: K2.4@18.85,77.05 K2.4 19,76 20,75 R20.2
"Line right N": R46.1 U1.18 | length 10.5
  Top Layer w0.5: U1.18 11.625,44.187 cw(c12.125,44.187) 12.125,44.687 16.5,44.687 ccw(c16.5,45.187) 17,45.187 R46.1
"Line right P": R44.1 U1.19 | length 18.7
  Top Layer w0.5: U1.19 12.895,43.132 cw(c13.395,43.132) 13.395,43.632 17.5,43.632 ccw(c17.5,44.132) 18,44.132 18,44.604 cw(c18.5,44.604) 18.5,45.104 26.458,45.104 ccw(c26.458,45.604) 26.957,45.589 26.992,46.75 R44.1
LK: CP1.4 U1.9 | length 5.2
  Top Layer w0.5: U1.9 16.705,27.158 ccw(c17.205,27.158) 16.851,26.805 18.394,25.261 cw(c18.04,24.908) 18.54,24.908 CP1.4
MISO: IC5.16 ICSP.1 | length 7.3
  Top Layer w0.5: IC5.16 41.8,46.293 42.093,46 ICSP.1
MOSI: IC5.15 ICSP.4 | length 26.8
  Top Layer w0.5: IC5.15 41,39 42,38 48,38 49,39 49,43 48.54,43.46 ICSP.4
NetC24_1: C24.1 CP2102.2 R13.2 | length 6.5
  Top Layer w0.5: C24.1 42.919,63.475 R13.2 43.097,63.46 CP2102.2
NetC27_1: C27.1 IC5.7 R14.1 Z1.1 Z1.2 | length 11.6
  Top Layer w0.5: C27.1 30.672,46.559 ccw(c30.651,46.559) R14.1 ccw(c30.651,46.929) 31,46.929 Z1.2 Z1.1 cw(c33,51) 33,53 IC5.7
NetC28_1: C28.1 IC5.8 R14.2 Z1.3 Z1.4 | length 9.7
  Top Layer w0.5: C28.1@32.739,44.534 cw(c32.739,44.623) 32.651,44.623 R14.2 32.651,49.049 ccw(c32.4,49.049) Z1.3 Z1.4 cw(c33.6,51) 33.6,52.2 IC5.8
NetC35_2: C35.2 R24.1 | length 2
  Top Layer w0.5: C35.2 R24.1
NetC36_2: C36.2 R25.2 | length 2
  Top Layer w0.5: R25.2 C36.2
NetC37_2: C37.2 R26.1 | length 2
  Top Layer w0.5: C37.2 R26.1
NetC38_2: C38.2 R27.2 | length 2
  Top Layer w0.5: R27.2 C38.2
NetC39_1: C39.1 R44.2 | length 2
  Top Layer w0.5: C39.1 R44.2
NetC39_2: C39.2 R36.2 | length 2
  Top Layer w0.5: R36.2 C39.2
NetC40_1: C40.1 R45.2 | length 2
  Top Layer w0.5: C40.1 R45.2
NetC40_2: C40.2 R42.2 | length 2
  Top Layer w0.5: R42.2 C40.2
NetC41_1: C41.1 R46.2 | length 2
  Top Layer w0.5: R46.2 C41.1
NetC41_2: C41.2 R32.2 | length 2
  Top Layer w0.5: C41.2 R32.2
NetC42_1: C42.1 R47.2 | length 2
  Top Layer w0.5: R47.2 C42.1
NetC42_2: C42.2 R37.2 | length 2
  Top Layer w0.5: C42.2 R37.2
NetCP2102_3: CP2102.3 R15.2 | length 7.7
  Bottom Layer w0.5: R15.2@41.125,65.733 cw(c41.125,66.233) 41.098,65.734 40.907,65.745 R15.2 43.005,65.995 44,65 45.957,65 46.957,66 CP2102.3
NetCP2102_4: CP2102.4 R16.2 | length 6.3
  Top Layer w0.5: R16.2 46.959,68.499 CP2102.4
NetCP2102_6: CP2102.6 D3.2 | length 4.2
  Top Layer w0.5: D3.2 46.214,74 46.594,73.62 CP2102.6
NetD2_2: D2.2 POWER.1 | length 4.2
  Bottom Layer w0.5: D2.2 POWER.1
NetIC1_1: IC1.1 R8.2 | length 5.6
  Top Layer w0.5: v1(39.5,72.5) 40.449,71.551 40.449,70.818 R8.2
  Bottom Layer w0.5: v1(39.5,72.5) 39.5,75.634 IC1.1
NetIC1_6: IC1.6 R4.1 | length 4.9
  Bottom Layer w0.5: IC1.6 36.988,83.988 37,84 R4.1
NetIC1_7: IC1.7 R3.1 | length 5.8
  Bottom Layer w0.5: IC1.7 38.258,82.258 40.572,84.572 R3.1@40.572,85.902 ; R3.1 R3.1@40.556,85.907
NetIC5_9: IC5.9 R10.2 | length 13.2
  Top Layer w0.5: R10.2 33,39.125 33.25,39.375 33.375,39.375 36.2,42.2 IC5.9 IC5.9@36.155,50.717
NetIC5_10: IC5.10 R11.2 | length 15.5
  Top Layer w0.5: R11.2 33,37.125 33.25,37.375 33.375,37.375 37,41 IC5.10 IC5.10@37.008,50.754
NetIC5_11: IC5.11 R17.2 | length 17.8
  Top Layer w0.5: R17.2 33,35.125 33.25,35.375 33.375,35.375 37.8,39.8 IC5.11
NetIC5_12: IC5.12 R18.2 | length 20.2
  Top Layer w0.5: R18.2 33,33.125 33.25,33.375 33.375,33.375 38.6,38.6 IC5.12
NetIC5_13: IC5.13 R19.2 | length 22.5
  Top Layer w0.5: R19.2 33,31.125 33.25,31.375 33.375,31.375 39.4,37.4 IC5.13
NetIC6_2: IC6.2 R20.1 R24.2 R28.1 | length 14.9
  Top Layer w0.5: R28.1 16,65 ; IC6.2 17.983,65 16,65 ; R20.1 R24.2 18,70.457 cw(c17.5,70.457) 17.854,70.104 16.146,68.396 ccw(c16.5,68.043) 16,68.043 16,65
NetIC6_6: IC6.6 R32.1 R33.1 | length 12.3
  Top Layer w0.5: IC6.6 20.5,54.92 cw(c20.5,54.42) 21,54.42 R32.1
  Bottom Layer w0.5: IC6.6 ccw(c18.063,56.857) 20,56.857 R33.1 19.75,56.75 R33.1@19.75,56.607
NetIC6_7: IC6.7 R28.2 R43.1 | length 11.5
  Top Layer w0.5: R28.2 16,54.443 ccw(c18.063,54.443) IC6.7
  Bottom Layer w0.5: IC6.7 ccw(c19.443,52.38) 19.443,51 R43.1
NetIC6_8: IC6.8 R29.2 R34.2 | length 11.1
  Top Layer w0.5: IC6.8 ccw(c25.937,54.443) 28,54.443 R29.2
  Bottom Layer w0.5: R34.2 25.317,53 cw(c25.317,52.38) IC6.8
NetIC6_9: IC6.9 R35.1 R36.1 | length 10.6
  Top Layer w0.5: R36.1 23,54.42 cw(c23.5,54.42) 23.5,54.92 IC6.9
  Bottom Layer w0.5: R35.1 25.857,55 cw(c25.857,54.92) IC6.9
NetIC6_13: IC6.13 R21.1 R25.1 R29.1 | length 14.9
  Top Layer w0.5: R21.1 R25.1 26,70 28,68 28,65 ; IC6.13 27.92,65.08 28,65 ; R29.1 28,65
NetIC7_2: IC7.2 R22.1 R26.2 R30.1 | length 14.9
  Top Layer w0.5: R30.1 2,65 ; IC7.2 2.08,65.08 2,65 ; R22.1 R26.2 4,70.707 cw(c3.5,70.707) 3.854,70.354 2.146,68.646 ccw(c2.5,68.293) 2,68.293 2,65
NetIC7_6: IC7.6 R37.1 R38.1 | length 11.8
  Top Layer w0.5: IC7.6 6.5,54.92 cw(c6.5,54.42) 7,54.42 R37.1
  Bottom Layer w0.5: IC7.6 ccw(c4.063,56.857) 6,56.857 R38.1
NetIC7_7: IC7.7 R30.2 R39.1 | length 11.5
  Top Layer w0.5: R30.2 2,54.443 ccw(c4.063,54.443) IC7.7
  Bottom Layer w0.5: IC7.7 ccw(c5.443,52.38) 5.443,51 R39.1
NetIC7_8: IC7.8 R31.2 R40.2 | length 11.1
  Top Layer w0.5: IC7.8 ccw(c11.937,54.443) 14,54.443 R31.2
  Bottom Layer w0.5: R40.2 11.317,53 cw(c11.317,52.38) IC7.8
NetIC7_9: IC7.9 R41.1 R42.1 | length 10.6
  Top Layer w0.5: R42.1 9,49.25 9,54.42 cw(c9.5,54.42) 9.5,54.92 IC7.9
  Bottom Layer w0.5: R41.1 11.857,55 cw(c11.857,54.92) IC7.9
NetIC7_13: IC7.13 R23.1 R27.1 R31.1 | length 14.9
  Top Layer w0.5: R23.1 R27.1 12,70.457 ccw(c12.5,70.457) 12.146,70.104 13.854,68.396 cw(c13.5,68.043) 14,68.043 14,65 ; IC7.13 13.92,65.08 14,65 ; R31.1 14,65
NetL13_2: L13.2 R6.2 | length 2.8
  Bottom Layer w0.5: L13.2 R6.2
NetQ1_1: Q1.1 R1.2 | length 20.9
  Top Layer w0.5: R1.2 v1(31,78)
  Bottom Layer w0.5: Q1.1 29.108,80.95 cw(c29.108,80.45) 29.462,80.804 30.854,79.412 cw(c30.5,79.058) 31,79.058 v1(31,78)
NetQ1_2: Q1.2 R2.2 | length 4.6
  Bottom Layer w0.5: Q1.2 27.743,79.05 cw(c27.743,78.55) 28.099,78.901 28.212,78.788 29.984,77.016 cw(c29.629,76.664) 30.129,76.664 30.129,76.508 R2.2@30.216,76.258
NFSCH: D1.2 K1.8 K2.1 Q1.3 | length 33.2
  Top Layer w0.5: K1.8 13.592,84.8 13.792,85 v1(14,85) 14.208,85 14.408,84.8 K2.1
  Bottom Layer w0.5: 13,84 13.225,84.225 ; v1(14,85) 13.225,84.225 ; Q1.3 24.95,79 23.95,78 11.293,78 11,78.293 D1.2 13.225,84.225
PAUSE: R17.1 U1.30 | length 9
  Top Layer w0.5: U1.30 28.365,34.365 29,35 R17.1
PLAY: R11.1 U1.31 | length 9.3
  Top Layer w0.5: U1.31 27.635,35.635 29,37 R11.1
RESET: C24.2 IC5.29 ICSP.5 R12.1 | length 32.8
  Top Layer w0.5: IC5.29 C24.2 ; C24.2@38.603,63.478 38.603,65.933 R12.1 ; 38.653,61.301 38.682,61.272 v1(39.881,61.272)
  Bottom Layer w0.5: v1(39.881,61.272) 39.881,41.213 40.174,40.92 ICSP.5
RS485DE: IC1.2 IC1.3 IC5.32 | length 22.4
  Top Layer w0.5: v1(34.085,69) ccw(c34.5,68.721) 34,68.723 34,61.93 36.15,59.78 36.15,59.288 IC5.32
  Bottom Layer w0.5: v1(34.085,69) 34.822,69 ccw(c34.822,69.5) 35.174,69.145 37.63,71.602 37.63,73.161 ; IC1.3 36.988,73.803 37.63,73.161 ; IC1.2 38.258,73.789 37.63,73.161
SB: CP1.1 U1.6 | length 5.3
  Top Layer w0.5: CP1.1 10.92,25.411 cw(c11.42,25.411) 11.066,25.763 12.749,27.447 ccw(c12.395,27.8) 12.895,27.8 U1.6
SI: CP1.3 U1.8 | length 4.7
  Top Layer w0.5: U1.8 15.435,26.566 ccw(c15.935,26.566) 15.581,26.214 15.854,25.94 cw(c15.5,25.587) 16,25.587 CP1.3
"SKIP B": R19.1 U1.2 | length 37.9
  Top Layer w0.5: U1.2@7.799,28.507 7.799,21.5 ccw(c8.299,21.5) 8.299,21 25.404,21 ccw(c25.404,21.5) 25.757,21.146 28.854,24.243 ccw(c28.5,24.596) 29,24.596 29,29.86 cw(c29.5,29.86) 29.146,30.212 29.788,30.854 cw(c30.14,30.5) 30.14,31 R19.1
"SKIP F": R18.1 U1.3 | length 36.2
  Top Layer w0.5: U1.3 9.027,28.023 9.027,22.5 ccw(c9.527,22.5) 9.527,22 25,22 27.719,24.719 ccw(c27.365,25.072) 27.865,25.072 27.865,30.558 cw(c28.365,30.558) 28.012,30.912 29.954,32.854 cw(c30.307,32.5) 30.307,33 R18.1
SO: CP1.2 U1.7 | length 4.8
  Top Layer w0.5: CP1.2 13.46,24.199 cw(c13.96,24.199) 13.606,24.551 14.004,24.95 ccw(c13.65,25.303) 14.15,25.303 14.163,28.023 U1.7
SOUNDON: IC5.1 R1.1 | length 6.3
  Top Layer w0.5: R1.1 31,59 32.2,57.8 33,57.8 IC5.1
STATBT: R7.1 R10.1 U1.34 | length 14.6
  Top Layer w0.5: U1.34 26.598,39.445 cw(c26.598,38.945) 26.952,39.298 v1(26.978,39.272) ccw(c27.332,39.625) 27.332,39.125 R10.1@31,39.125
  Bottom Layer w0.5: v1(26.978,39.272) 27,39.25 R7.1
"UART RX": IC5.30 R8.1 R16.1 | length 14.7
  Top Layer w0.5: IC5.30 37.8,61.2 37,62 37,68.499 ; R16.1 37,68.499 ; R8.1 37.592,70.592 37,70 37,68.499
"UART TX": IC1.4 IC5.31 R15.1 | length 31.1
  Top Layer w0.5: v1(35.674,72.25) 35.674,61.792 37,60.466 IC5.31
  Bottom Layer w0.5: IC1.4 35.674,75.619 v1(35.674,72.25) 33.5,72.25 ccw(c33.5,71.75) 33,71.75 33,66.495 ccw(c33.5,66.495) 33.5,65.995 R15.1
pads on no net: CP2102.1 IC5.2 IC5.14 IC5.19 IC5.20 IC5.22 IC5.23 IC5.24 IC5.25 IC5.26 IC5.27 IC5.28 IN. OUT. POWER. U1.4 U1.5 U1.11 U1.13 U1.14 U1.20 U1.21 U1.22 U1.23 U1.24 U1.25 U1.26 U1.28 U1.29 U1.32 U1.33 Z1. Z1.5

## Polygon pours and split planes (outlines as drawn)
GND on Top Layer "GND_L01_P004" (solid, pour order 4): 0,111 51,111 51,0 13.5,0 13.5,19.5 29.5,19.5 29.5,77.5 0,77.5
GND on Top Layer "GND_L01_P003" (solid, pour order 3): 6,40.478 29,40.478 29,20 13,20 13,0 0,0 0,29 6,29
GND on Top Layer "GND_L01_P000" (solid, pour order 0): 0,77 29,77 29,41 0,41 0,44
GND on Bottom Layer "GND_L02_P006" (solid, pour order 6): 0.023,111 51.023,111 51.023,0 13.523,0 13.523,19.5 29.523,19.5 29.523,77.5 0.023,77.5
GND on Bottom Layer "GND_L02_P002" (solid, pour order 2): 6,40.478 29,40.478 29,20 13,20 13,0 0,0 0,29 6,29
GND on Bottom Layer "GND_L02_P001" (solid, pour order 1): 0,77 29,77 29,41 0,41 0,44

## Keep-outs
Keep-Out Layer:
  lines w0.5: 0,1.27 ccw(c1.27,1.27) 1.27,0 49.73,0 ccw(c49.73,1.27) 51,1.27 51,109.73 ccw(c49.73,109.73) 49.73,111 48,111 1.27,111 ccw(c1.27,109.73) 0,109.73 0,1.27

## Other copper
Bottom Layer:
  text "CDCEMU2000" at 25.298,36.938 h3
  text "HW01" at 48.496,10.254 h1.52